# EAGLE board test (EAGLE 7.1.0)

Size 114.3 x 190.5 mm. Coordinates in mm from the lower left corner, seen from the top.
Copper layers (1*16): Top 0.035mm / dielectric 1.5mm / Bottom 0.035mm
Design rules "default": minimum track width 0.2mm, minimum drill 0.3mm, track to track 0.2mm, track to pad 0.2mm, pad to pad 0.2mm, via to via 0.2mm, smd to smd 0.3mm, copper to edge 0.25mm, drill to drill 0.4mm, minimum pad ring 0.2mm, minimum via ring 0.2mm, stop-mask expansion 0.1mm, vias tented up to drill 0mil, thermal gap 0.2mm

## Footprints (pad centres in the part's own frame; a part is rotated, then mirrored left to right if it is on the bottom)
CONN_SMB = drill 1.3 pad 2.1: 1 0,0 | drill 1.5 pad 2.3: SHIELD_0 2.55,-2.55; SHIELD_1 -2.55,-2.55; SHIELD_2 -2.55,2.55; SHIELD_3 2.55,2.55
W9X1 = drill 0.9 pad 1.4: 1 -10.16,0; 2 -7.62,0; 3 -5.08,0; 4 -2.54,0; 5 0,0; 6 2.54,0; 7 5.08,0; 8 7.62,0; 9 10.16,0
W10X2 = drill 0.9 pad 1.4: 1 -11.43,-1.27; 2 -11.43,1.27; 3 -8.89,-1.27; 4 -8.89,1.27; 5 -6.35,-1.27; 6 -6.35,1.27; 7 -3.81,-1.27; 8 -3.81,1.27; 9 -1.27,-1.27; 10 -1.27,1.27; 11 1.27,-1.27; 12 1.27,1.27; 13 3.81,-1.27; 14 3.81,1.27; 15 6.35,-1.27; 16 6.35,1.27; 17 8.89,-1.27; 18 8.89,1.27; 19 11.43,-1.27; 20 11.43,1.27
W11X2 = drill 0.9 pad 1.4: 1 -12.7,-1.27; 2 -12.7,1.27; 3 -10.16,-1.27; 4 -10.16,1.27; 5 -7.62,-1.27; 6 -7.62,1.27; 7 -5.08,-1.27; 8 -5.08,1.27; 9 -2.54,-1.27; 10 -2.54,1.27; 11 0,-1.27; 12 0,1.27; 13 2.54,-1.27; 14 2.54,1.27; 15 5.08,-1.27; 16 5.08,1.27; 17 7.62,-1.27; 18 7.62,1.27; 19 10.16,-1.27; 20 10.16,1.27; 21 12.7,-1.27; 22 12.7,1.27
JOINT_RIBBONCABLE_20 = drill 0.9 pad 1.4: 1 -11.43,-1.27; 2 -11.43,1.27; 3 -8.89,-1.27; 4 -8.89,1.27; 5 -6.35,-1.27; 6 -6.35,1.27; 7 -3.81,-1.27; 8 -3.81,1.27; 9 -1.27,-1.27; 10 -1.27,1.27; 11 1.27,-1.27; 12 1.27,1.27; 13 3.81,-1.27; 14 3.81,1.27; 15 6.35,-1.27; 16 6.35,1.27; 17 8.89,-1.27; 18 8.89,1.27; 19 11.43,-1.27; 20 11.43,1.27
SOCKET_DIL8 = drill 0.8 pad 1.4: 1 -3.81,-3.81; 2 -1.27,-3.81; 3 1.27,-3.81; 4 3.81,-3.81; 5 3.81,3.81; 6 1.27,3.81; 7 -1.27,3.81; 8 -3.81,3.81
W3X1 = drill 0.9 pad 1.4: 1 -2.54,0; 2 0,0; 3 2.54,0
OMRON_G6K_2P = drill 0.8 pad 1.4: 1 -3.81,-2.54; 2 -1.27,-2.54; 3 1.27,-2.54; 4 3.81,-2.54; 5 3.81,2.54; 6 1.27,2.54; 7 -1.27,2.54; 8 -3.81,2.54
RELAY_DIL14 = drill 0.8 pad 1.4 square: 1 -7.62,-3.81 | drill 0.8 pad 1.4: 2 -5.08,-3.81; 6 5.08,-3.81; 7 7.62,-3.81; 8 7.62,3.81; 9 5.08,3.81; 13 -5.08,3.81; 14 -7.62,3.81
W4X1 = drill 0.9 pad 1.4: 1 -3.81,0; 2 -1.27,0; 3 1.27,0; 4 3.81,0
W9X2 = drill 0.9 pad 1.4: 1 -10.16,-1.27; 2 -10.16,1.27; 3 -7.62,-1.27; 4 -7.62,1.27; 5 -5.08,-1.27; 6 -5.08,1.27; 7 -2.54,-1.27; 8 -2.54,1.27; 9 0,-1.27; 10 0,1.27; 11 2.54,-1.27; 12 2.54,1.27; 13 5.08,-1.27; 14 5.08,1.27; 15 7.62,-1.27; 16 7.62,1.27; 17 10.16,-1.27; 18 10.16,1.27
C100_08 = drill 1 pad 1.5: 1 -1.27,0; 2 1.27,0
SOCKET_DIL16 = drill 0.8 pad 1.4: 1 -8.89,-3.81; 2 -6.35,-3.81; 3 -3.81,-3.81; 4 -1.27,-3.81; 5 1.27,-3.81; 6 3.81,-3.81; 7 6.35,-3.81; 8 8.89,-3.81; 9 8.89,3.81; 10 6.35,3.81; 11 3.81,3.81; 12 1.27,3.81; 13 -1.27,3.81; 14 -3.81,3.81; 15 -6.35,3.81; 16 -8.89,3.81
RELAY_SIL7 = drill 0.8 pad 1.4: 1 -7.62,0; 3 -2.54,0; 5 2.54,0; 7 7.62,0
C200_08 = drill 1 pad 1.5: 1 -2.54,0; 2 2.54,0

## Placement (x,y rotation side)
AWG1.1  [CONN_SMB]  17.78,119.38 0 top
AWG1.2  [CONN_SMB]  17.78,99.06 0 top
AWG1.3  [CONN_SMB]  7.62,119.38 0 top
AWG2.1  [CONN_SMB]  7.62,99.06 90 top
AWG2.2  [CONN_SMB]  17.78,109.22 0 top
AWG2.3  [CONN_SMB]  7.62,109.22 0 top
E$2  [IC32Y1_PROBECARD]  57.15,95.25 0 top
E$3  [W9X1]  15.24,134.62 0 top
E$4  [W10X2]  80.01,153.67 0 bottom
E$58  [W11X2]  40.64,39.37 180 top
JT01  [JOINT_RIBBONCABLE_20]  29.21,173.99 270 top
JT02  [JOINT_RIBBONCABLE_20]  39.37,173.99 270 top
JT03  [JOINT_RIBBONCABLE_20]  49.53,173.99 270 top
JT04  [JOINT_RIBBONCABLE_20]  90.17,173.99 270 top
JT05  [JOINT_RIBBONCABLE_20]  100.33,173.99 270 top
K0  [SOCKET_DIL8]  8.89,151.13 0 top
K2  [SOCKET_DIL8]  21.59,151.13 0 top
K3  [W3X1]  30.48,152.4 90 top
L0  [SOCKET_DIL8]  8.89,140.97 0 top
L2  [SOCKET_DIL8]  21.59,140.97 0 top
L3  [OMRON_G6K_2P]  33.02,140.97 270 top
L5  [RELAY_DIL14]  48.26,143.51 0 top
L6  [RELAY_DIL14]  68.58,143.51 0 top
L7  [RELAY_DIL14]  88.9,143.51 0 top
L9  [SOCKET_DIL8]  105.41,143.51 0 top
M1  [W9X1]  15.24,127 0 top
M3  [OMRON_G6K_2P]  33.02,130.81 270 top
M5  [RELAY_DIL14]  48.26,133.35 0 top
M6  [RELAY_DIL14]  68.58,133.35 0 top
M7  [RELAY_DIL14]  88.9,133.35 0 top
M8  [W4X1]  100.33,127 0 top
M9  [OMRON_G6K_2P]  105.41,132.08 0 top
MST4  [W9X2]  55.88,153.67 0 top
N3  [OMRON_G6K_2P]  25.4,120.65 270 top
N7  [C100_08]  83.82,120.65 90 top
N8  [OMRON_G6K_2P]  93.98,120.65 270 top
N9  [SOCKET_DIL8]  105.41,120.65 0 top
NU  [JOINT_RIBBONCABLE_20]  59.69,173.99 270 top
NV  [JOINT_RIBBONCABLE_20]  69.85,173.99 270 top
NW  [JOINT_RIBBONCABLE_20]  80.01,173.99 270 top
P8  [OMRON_G6K_2P]  93.98,110.49 270 top
P9  [SOCKET_DIL8]  105.41,110.49 0 top
Q8  [SOCKET_DIL16]  100.33,100.33 0 top
R0  [SOCKET_DIL16]  13.97,87.63 0 top
R9  [RELAY_SIL7]  101.6,83.82 270 top
S0  [SOCKET_DIL16]  13.97,77.47 0 top
S8  [RELAY_SIL7]  96.52,83.82 270 top
S9  [RELAY_SIL7]  106.68,83.82 270 top
T0  [OMRON_G6K_2P]  7.62,67.31 270 top
T1  [OMRON_G6K_2P]  15.24,67.31 270 top
T2  [OMRON_G6K_2P]  22.86,67.31 270 top
T7  [C100_08]  86.36,72.39 90 top
T9  [RELAY_DIL14]  99.06,67.31 0 top
U0  [OMRON_G6K_2P]  7.62,57.15 270 top
U1  [OMRON_G6K_2P]  15.24,57.15 270 top
U2  [OMRON_G6K_2P]  22.86,57.15 270 top
U4  [RELAY_DIL14]  38.1,57.15 0 top
U5  [RELAY_DIL14]  58.42,57.15 0 top
U7  [RELAY_DIL14]  78.74,57.15 0 top
U9  [RELAY_DIL14]  99.06,57.15 0 top
V0  [OMRON_G6K_2P]  7.62,46.99 270 top
V1  [OMRON_G6K_2P]  15.24,46.99 270 top
V2  [OMRON_G6K_2P]  22.86,46.99 270 top
V4  [RELAY_DIL14]  38.1,46.99 0 top
V5  [RELAY_DIL14]  58.42,46.99 0 top
V7  [RELAY_DIL14]  78.74,46.99 0 top
V9  [RELAY_DIL14]  99.06,46.99 0 top
VDD  [C200_08]  73.66,127 180 top
W0  [RELAY_SIL7]  15.24,38.1 0 top
W1  [RELAY_SIL7]  15.24,33.02 0 top
W5  [OMRON_G6K_2P]  60.96,36.83 270 top
W8  [OMRON_G6K_2P]  93.98,36.83 270 top
W9  [SOCKET_DIL8]  105.41,36.83 0 top
X0  [RELAY_SIL7]  15.24,27.94 0 top
X1  [RELAY_SIL7]  15.24,22.86 0 top
X4  [RELAY_DIL14]  38.1,26.67 0 top
X8  [SOCKET_DIL16]  100.33,26.67 0 top
Y0  [RELAY_SIL7]  15.24,17.78 0 top
Y1  [RELAY_SIL7]  15.24,12.7 0 top
Y3  [SOCKET_DIL8]  31.75,16.51 0 top
Y4  [OMRON_G6K_2P]  43.18,16.51 270 top
Y8  [RELAY_SIL7]  91.44,10.16 270 top
Y9  [RELAY_SIL7]  101.6,10.16 270 top
Z3  [SOCKET_DIL16]  36.83,6.35 0 top
Z8  [RELAY_SIL7]  96.52,10.16 270 top
Z9  [RELAY_SIL7]  106.68,10.16 270 top

## Library data of the parts
AWG1.1-AWG1.3 AWG2.1-AWG2.3 E$3 E$4 E$58 JT01-JT05 K3 L5-L7 M1 M5-M8 MST4 NU NV NW R9 S8 S9 T9 U4 U5 U7 U9 V4 V5 V7 V9 W0 W1 X0 X1 X4 Y0 Y1 Y8 Y9 Z8 Z9 = mechanic
E$2 = tent_bb
K0 K2 L0 L2 L9 N9 P9 Q8 R0 S0 W9 X8 Y3 Z3 = socket
L3 M3 M9 N3 N8 P8 T0 T1 T2 U0 U1 U2 V0 V1 V2 W5 W8 Y4 = omron
N7 T7 VDD = discrete

## Text on the board
Dimension: 18 | 10 | 1 | 9
tDocu: K | L | M | N | P | Q | MSBTT | R | S | T | U | V | W | X | Y | Z | 0 | 1 | 2 | 3 | 4 | 5 | 6 | 7 | 8 | 9